# Altium PCB SW 12.PcbDoc
Units mil, origin at the board's own origin, x right, y up, seen from the top; angles counter-clockwise.
Board outline 2753 x 2757 mil, 2 copper layers (Top Layer, Bottom Layer); 38 components, 16 nets, 98 pads, 206 vias.
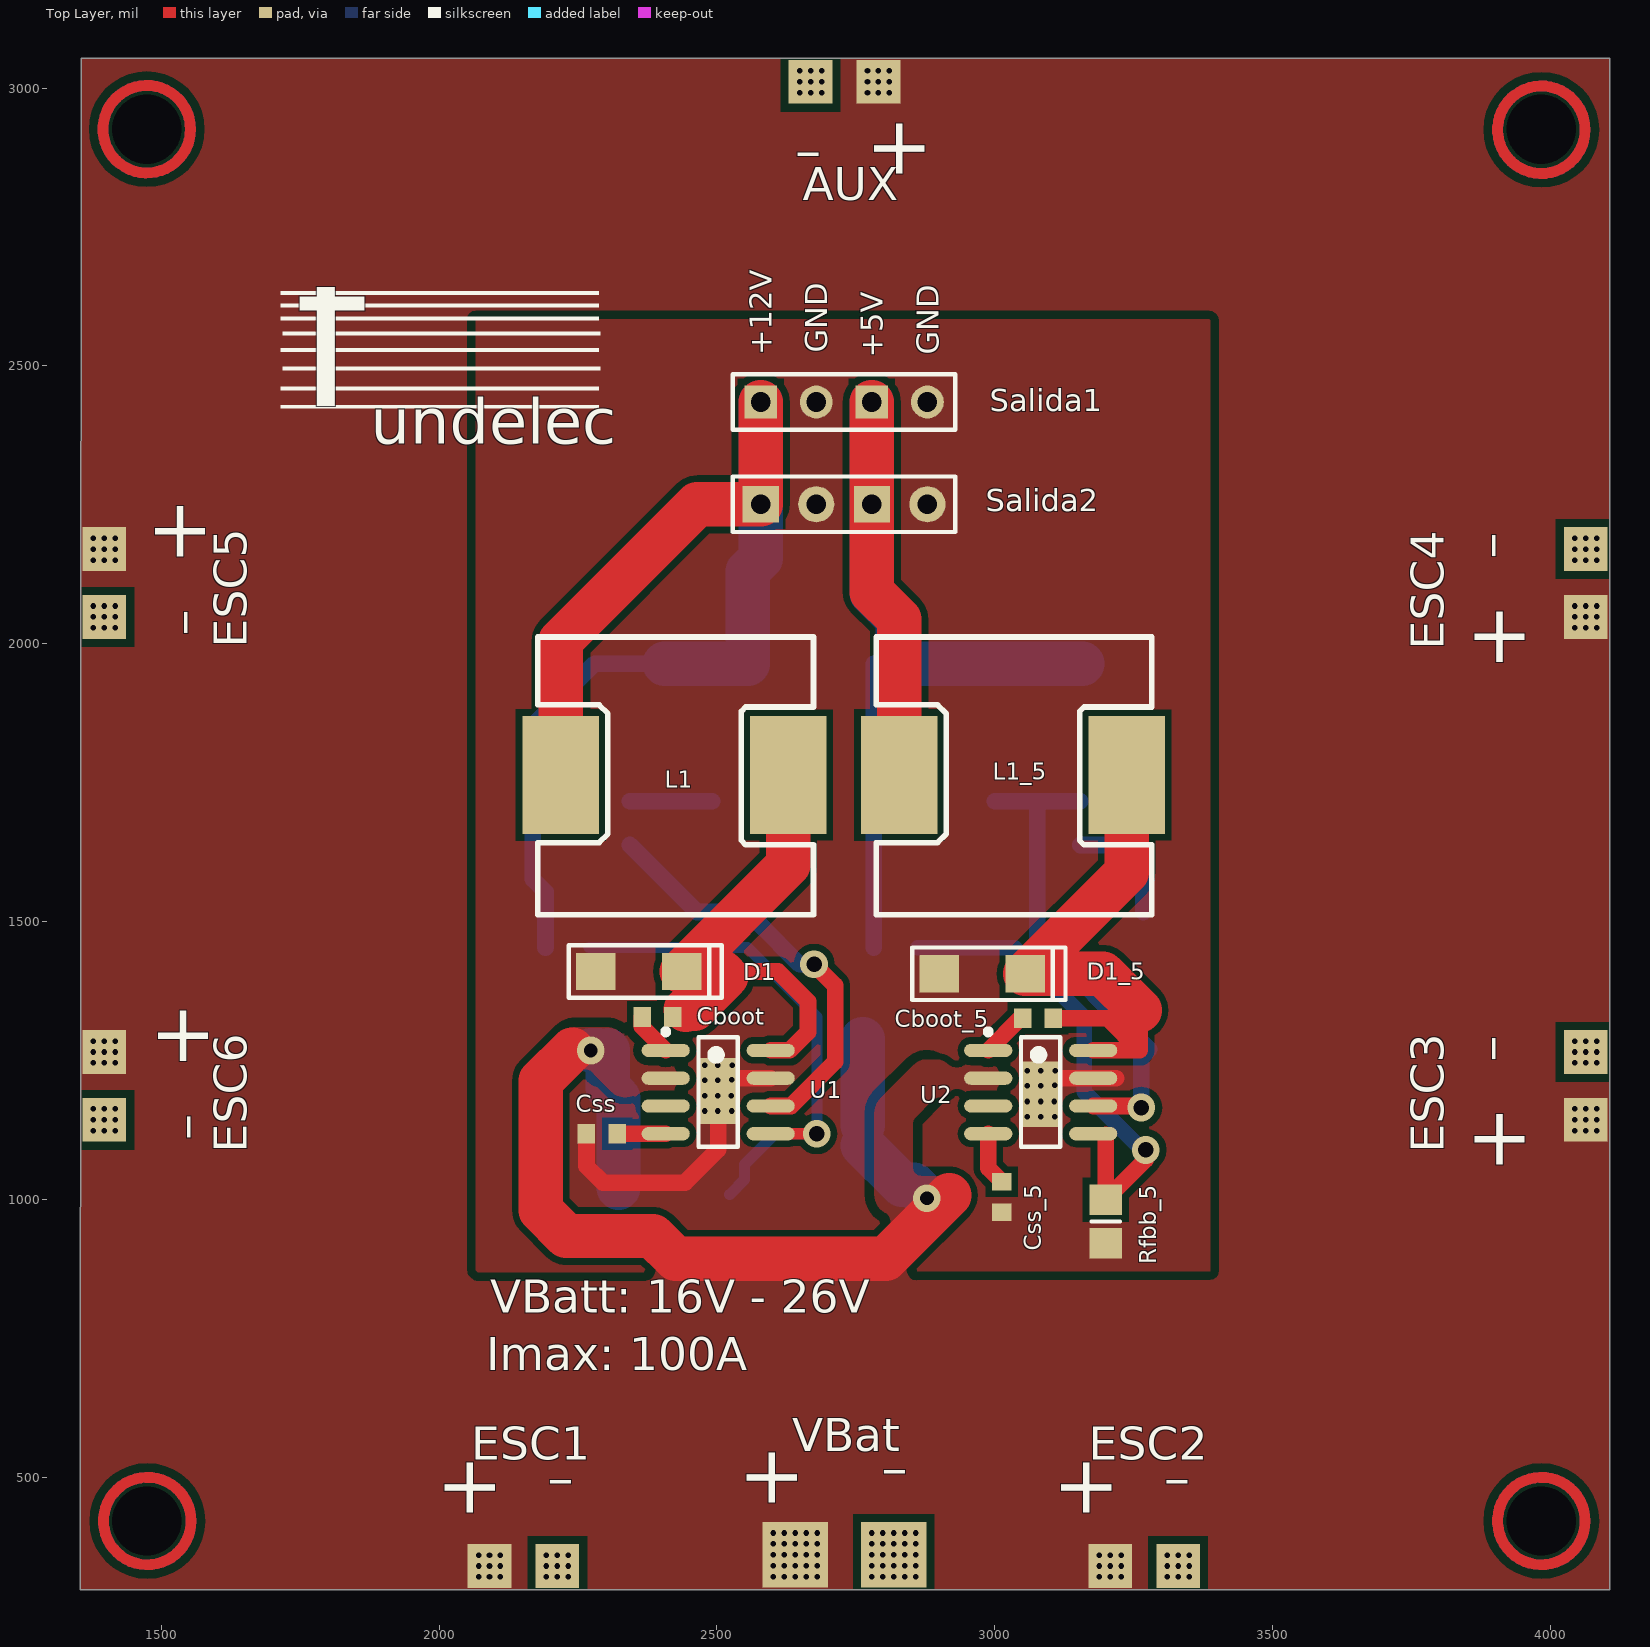
[diagram p0: Top Layer view]
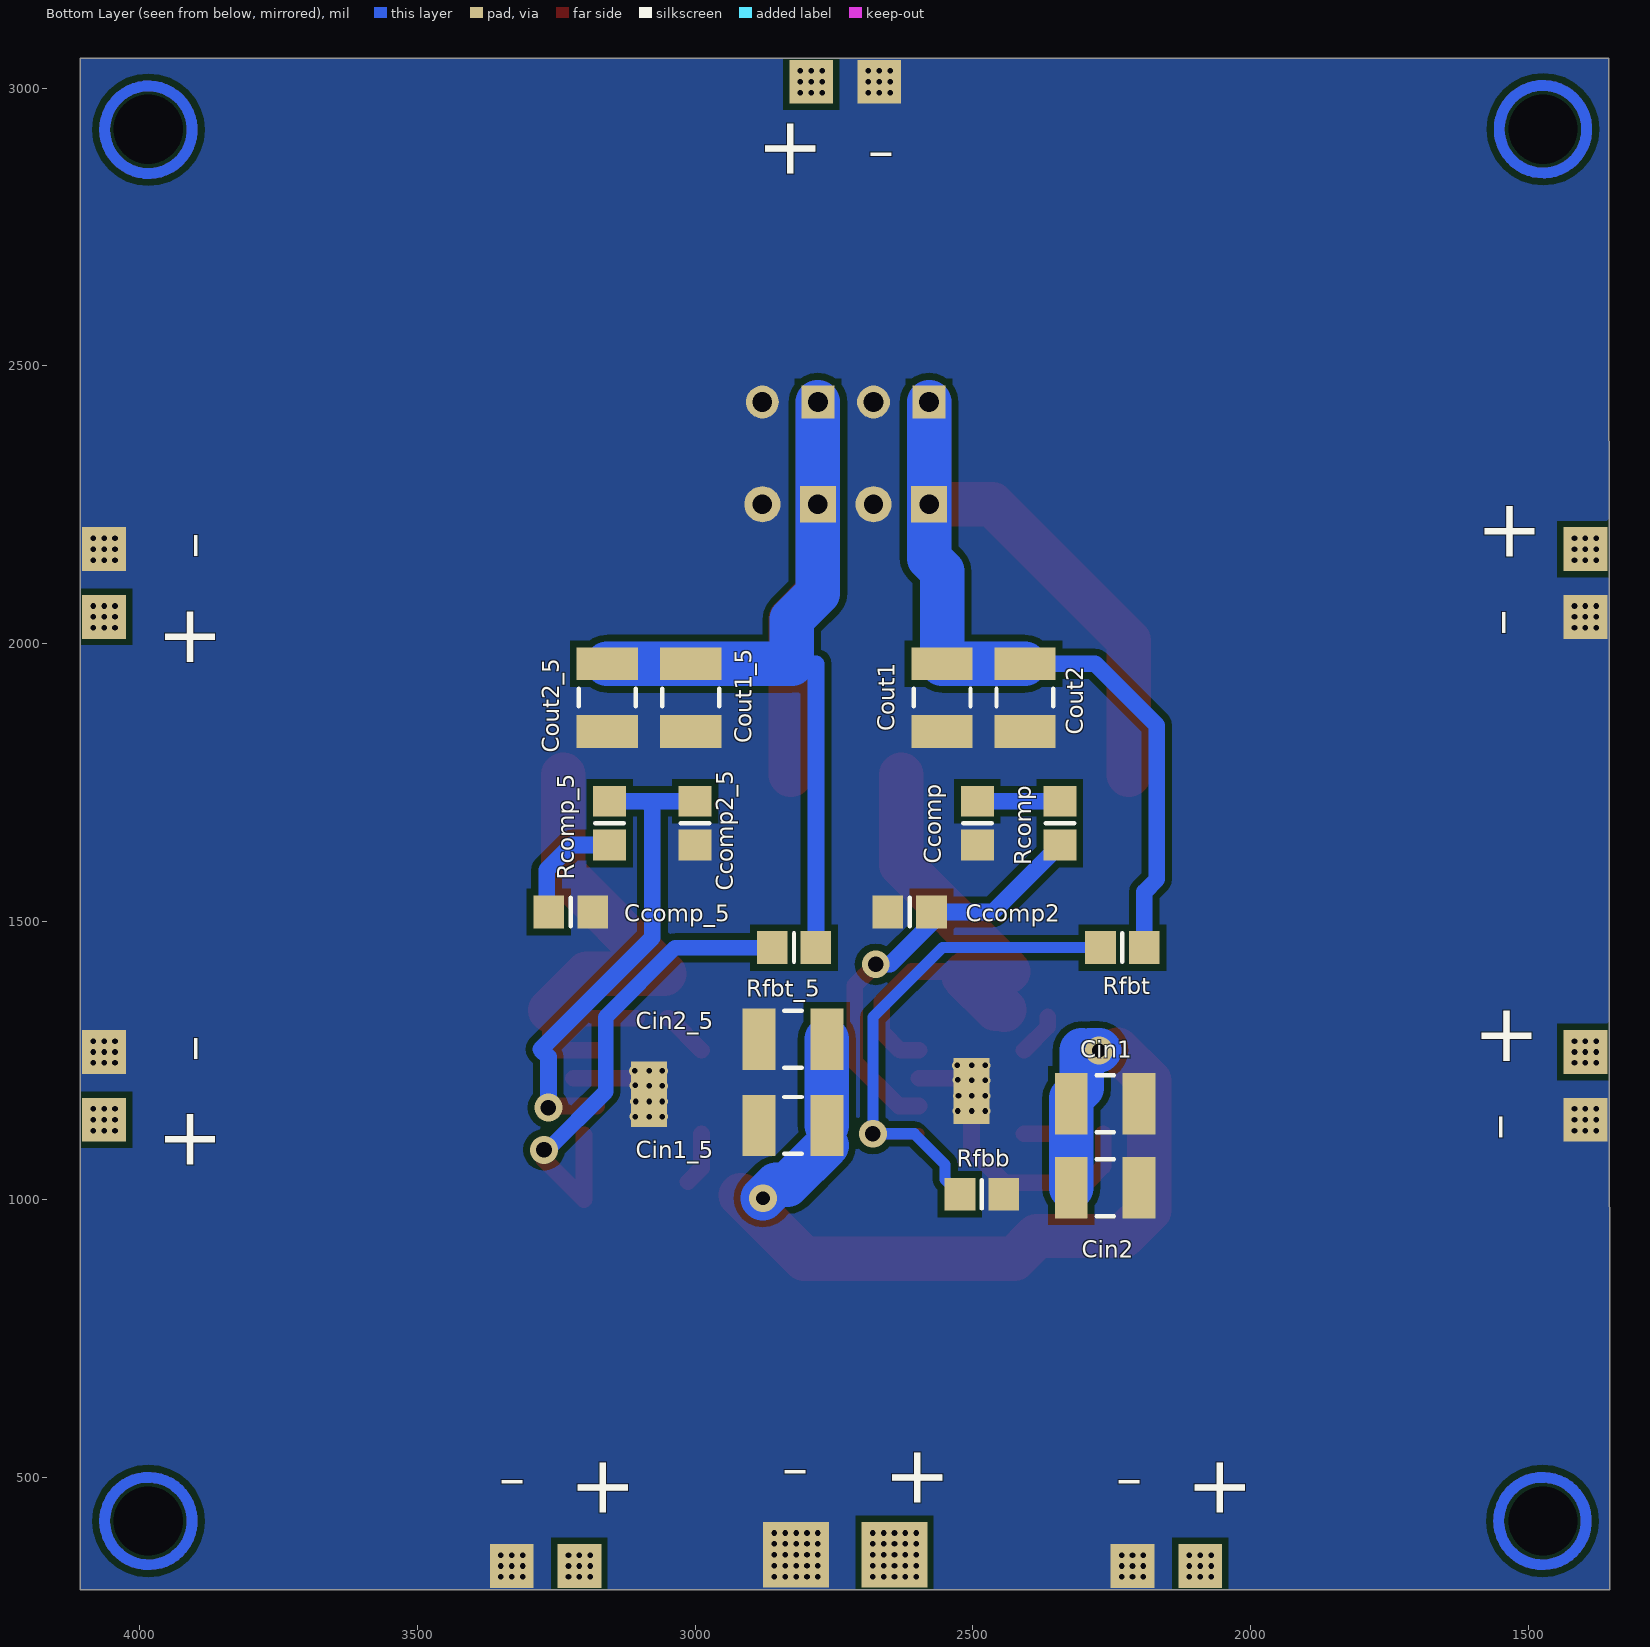
[diagram p1: Bottom Layer view, seen from below]

## Layer stack, top to bottom
Top Solder: solder mask 0.4, Solder Resist, Dk 3.5
Top Layer: signal copper 1.4
Dielectric 1: dielectric 12.6, FR-4, Dk 4.8
Bottom Layer: signal copper 1.4
Bottom Solder: solder mask 0.4, Solder Resist, Dk 3.5

## Board outline
1354,297 4107,297 4107,3054 1356,3054

## Design rules (kind name [scope] priority, off if disabled: settings)
Clearance [All] p1: gap=12
ComponentClearance [All] p1: gap=5 collisioncheckmode=3 verticalgap=5 showdistances=FALSE
PlaneConnect [All] p1: planeconnectstyle=Direct reliefexpansion=20 reliefentries=4 reliefconductorwidth=10 reliefairgap=10
PolygonConnect [All] p1: connectstyle=Direct reliefconductorwidth=10 reliefentries=4 polygonreliefangle="90 Angle" airgapwidth=10
RoutingVias [All] p1: holewidth=25 width=50 viastyle="Through Hole" minholewidth=1 minwidth=1 maxholewidth=28 maxwidth=50
SolderMaskExpansion [All] p1: expansion=4
Width [All] p1: maxlimit=80 minlimit=10 preferedwidth=20
28 further rules are at their usual default settings.

## Classes and differential pairs
component class SW_S_12: Cboot Ccomp Ccomp2 Cin1 Cin2 Cout1 Cout2 Css D1 Iout L1 Rcomp Rfbb Rfbt U1 Vin
component class "SW 12": AUX ESC1 ESC2 ESC3 ESC4 ESC5 ESC6 Salida1 Salida2 VBat
component class SW_S_5: Cboot_5 Ccomp2_5 Ccomp_5 Cin1_5 Cin2_5 Cout1_5 Cout2_5 Css_5 D1_5 L1_5 Rcomp_5 Rfbb_5 Rfbt_5 U2

## Components (designator, comment, footprint, x,y, rotation, side; value= is the part's Value field where it differs from the comment)
AUX "Header 2" "14 AWG Power Footprint" 2849.9,3070.37 r180 top
Cboot "C1608X7R1E104K" 1608[0603] 2393,1328 r0 top
Cboot_5 "C1608X7R1E104K" 1608[0603] 3078,1326 r0 top
Ccomp "CC0805KRX7R9BB152" 6-0805_M 2492,1677 r270 bottom
Ccomp2 "CL21C300JBANNNC" 6-0805_M 2614,1517 r0 bottom
Ccomp2_5 "CL21C300JBANNNC" 6-0805_M 3000,1677 r270 bottom
Ccomp_5 "CC0805KRX7R9BB152" 6-0805_M 3224,1517 r180 bottom
Cin1 "GRM32ER71H475KA88L" C1210_M 2262,1172 r180 bottom
Cin1_5 "GRM32ER71H475KA88L" C1210_M 2824,1133 r0 bottom
Cin2 "GRM32ER71H475KA88L" C1210_M 2262,1021 r180 bottom
Cin2_5 "GRM32ER71H475KA88L" C1210_M 2824,1288 r0 bottom
Cout1 "GRM32ER61E226KE15L" C1210_M 2555.5,1903 r270 bottom
Cout1_5 "GRM32ER61E226KE15L" C1210_M 3008,1903 r270 bottom
Cout2 "GRM32ER61E226KE15L" C1210_M 2406.5,1903 r270 bottom
Cout2_5 "GRM32ER61E226KE15L" C1210_M 3158,1903 r270 bottom
Css "GRM188R71E822KA01D" 1608[0603] 2293,1118 r180 top
Css_5 "GRM188R71E822KA01D" 1608[0603] 3013,1004 r270 top
D1 "B340A-13-F" "SMA Diode Package" 2359.5,1410 r180 top
D1_5 "B340A-13-F" "SMA Diode Package" 2978,1406 r180 top
ESC1 "Header 2" "14 AWG Power Footprint" 2031.78,281 r0 top
ESC2 "Header 2" "14 AWG Power Footprint" 3149.2,281 r0 top
ESC3 "Header 2" "14 AWG Power Footprint" 4122.86,1083.99 r90 top
ESC4 "Header 2" "14 AWG Power Footprint" 4122.86,1989.16 r90 top
ESC5 "Header 2" "14 AWG Power Footprint" 1338.58,2229.32 r270 top
ESC6 "Header 2" "14 AWG Power Footprint" 1338.58,1324.15 r270 top
L1 "SRR1260-150M" SRR1260 2426,1764 r180 top
L1_5 "SRR1260-150M" SRR1260 3035,1764 r180 top
Rcomp "CRCW080538K3FKEA" 6-0805_M 2343.5,1677 r90 bottom
Rcomp_5 "CRCW080538K3FKEA" 6-0805_M 3154,1677 r270 bottom
Rfbb "CRCW0805732RFKEA" 6-0805_M 2484,1009 r180 bottom
Rfbb_5 "CRCW0805732RFKEA" 6-0805_M 3200,960 r270 top
Rfbt "CRCW080510K2FKEA" 6-0805_M 2231,1453 r0 bottom
Rfbt_5 "CRCW080510K2FKEA" 6-0805_M 2822,1453 r0 bottom
Salida1 "Header 4" HDR1X4#1 2579,2435 r0 top (schematic designator Out1)
Salida2 "Header 4" HDR1X4#2 2579,2251 r0 top (schematic designator Out2)
U1 "TPS54331DDAR" TI-D8_N 2502.5,1193 r0 top
U2 "TPS54331DDAR" TI-D8_N 3083,1193 r0 top
VBat "Header 2" "10 AWG Power Footprint" 2582.18,301 r0 top (schematic designator Batt)

## Footprints (in the part's own frame and the unit in brackets; to place one, negate y for a bottom-side part, rotate by r counter-clockwise, add the part's x,y. Pads: shape width x height; smd on the part's side, far side on the other; paste and mask are expansions set on the pad)
6-0805_M [mm] "Chip Resistor, Body 2.0x1.2mm, IPC Low Density"
  rect 1.4x1.5 smd: 1(-1,0) 2(1,0)
  silkscreen extent 0,-0.65 0,0.65, body extent -1.07,-0.7 1.07,0.7, height 0.7
"10 AWG Power Footprint" [mm] "10 AWG Power Footprint"
  rect 3x3 all layers, no hole: 1(1.5,1.5) 2(6,1.5)
"14 AWG Power Footprint" [mm] "10 AWG Power Footprint"
  rect 2x2 all layers, no hole: 1(1.5,1.5) 2(4.6,1.5)
1608[0603] [mm] "Chip Capacitor, Body 1.6x0.8mm, IPC High Density"
  rect 0.8x0.9 smd: 1(-0.7,0) 2(0.7,0)
  body extent -0.87,-0.48 0.87,0.48, height 1.3
C1210_M [mm] "Chip Capacitor, Body 3.2x2.5mm, IPC Low Density"
  rect 1.5x2.8 smd: 1(-1.55,0) 2(1.55,0)
  silkscreen extent -0.4,-1.3 0.4,1.3, body extent -1.7,-1.35 1.7,1.35, height 1.5
HDR1X4#1 [mm] "Connector; Header; 4 Position"
  rect 1.5x1.5 hole 0.9: 1(0,0) 3(5.08,0)
  round 1.5 hole 0.9: 2(2.54,0) 4(7.62,0)
  silkscreen extent -1.27,-1.27 8.89,1.27
HDR1X4#2 [mm] "Connector; Header; 4 Position"
  rect 1.651x1.651 hole 0.889: 1(0,0) 3(5.08,0)
  round 1.651 hole 0.889: 2(2.54,0) 4(7.62,0)
  silkscreen extent -1.27,-1.27 8.89,1.27
"SMA Diode Package" [mm]
  rect 1.8x1.7 smd: 1(-1.965,0) 2(1.965,0)
  silkscreen extent -3.8,-1.2 3.2,1.2, body extent -2.6,-1.2 2.6,1.2, height 2.44
SRR1260 [mm]
  rect 3.5x5.4 smd paste+0: 1(-5.15,0)
  rect 3.5x5.4 smd: 2(5.25,0)
  silkscreen extent -6.3,-6.3 6.3,6.4, body extent -6.3,-6.3 6.3,6.4, height 6.15
TI-D8_N [mm] "SOIC, 8-Leads, Body 4.9x3.9mm, Pitch 1.27mm, IPC Medium Density"
  oval 2.2x0.6 smd: 1(-2.4,1.905) 2(-2.4,0.635) 3(-2.4,-0.635) 4(-2.4,-1.905) 5(2.4,-1.905) 6(2.4,-0.635) 7(2.4,0.635) 8(2.4,1.905)
  silkscreen extent -2.52,-2.5 0.9,2.88, body extent -2,-2.5 2,2.5, height 1.75

## Part data
AUX ESC1 ESC2 ESC3 ESC4 ESC5 ESC6 VBat: "Header, 2-Pin"
Ccomp Ccomp_5: "CC0805KRX7R9BB15"
Cin1 Cin1_5 Cin2 Cin2_5: "GRM32ER71H475KA8"
Cout1 Cout1_5 Cout2 Cout2_5: "GRM32ER61E226KE1"
Css Css_5: "GRM188R71E822KA0"
Salida1 Salida2: "Header, 4-Pin"

## Free pads (board coordinates)
  round 78.74 hole 125: 0(1474,421) 0(1474,2926) 0(3984,421) 0(3984,2926)
  rect 65x118.11 all layers, no hole: ""(2502.5,1195) ""(3083,1189)

## Via types
v1: diameter 10, hole 10, Top Layer to Bottom Layer, 176 vias
v2: diameter 20, hole 10, Top Layer to Bottom Layer, 24 vias
v3: diameter 50, hole 28, Top Layer to Bottom Layer, 4 vias
v4: diameter 50, hole 25, Top Layer to Bottom Layer, 2 vias

## Nets (pads, with @x,y where several pads share a name; then routed paths per layer and width w, separated by ;. In a path a pad name is that pad's centre, name@x,y a point inside that pad or via, vN(x,y) a via of type N, cw(c..) or ccw(c..) an arc to the next point about the centre after c; other vN are vias at no path point)
+5V: Cout1_5.1 Cout2_5.1 L1_5.2 Rfbt_5.1 Salida1.3 Salida2.3 | length 2024.9
  Top Layer w80: Salida1.3 Salida2.3 2779,2093 2828.31,2043.69 L1_5.2
  Bottom Layer w30: Rfbt_5.1 2782.63,1964.02
  Bottom Layer w80: Salida1.3 Salida2.3 2779,2091 2825.98,2044.02 2825.98,1964.02 Cout1_5.1 Cout2_5.1
+12V: Cout1.1 Cout2.1 L1.2 Rfbt.1 Salida1.1 Salida2.1 | length 2209.3
  Top Layer w80: L1.2 2219.31,2005.31 2465,2251 Salida2.1 Salida1.1
  Bottom Layer w30: Rfbt.1 2191.63,1553.37 2169,1576 2169,1853 2280.02,1964.02 Cout2.1
  Bottom Layer w80: Cout2.1 Cout1.1 2555.5,2130.5 2579,2154 Salida2.1 Salida1.1
GND: AUX.2 Ccomp2.2 Ccomp2_5.2 Ccomp.2 Ccomp_5.2 Cin1.2 Cin1_5.2 Cin2.2 Cin2_5.2 Cout1.2 Cout1_5.2 Cout2.2 Cout2_5.2 Css.2 Css_5.2 D1.2 D1_5.2 ESC1.2 ESC2.2 ESC3.2 ESC4.2 ESC5.2 ESC6.2 pad. Rfbb.2 Rfbb_5.2 Salida1.2 Salida1.4 Salida2.2 Salida2.4 U1.7 U2.7 VBat.2 | length 637.8
  Top Layer w30: Css.2 2265.44,1059.56 2295,1030 2443,1030 2502.5,1089.5 2502.5,1195 pad.@2502.5,1213.33 ; pad.@2525.5,1218 U1.7 ; pad.@3109,1218 U2.7 U2.7@3219.08,1218
  other v1: 2193.2,320.37 2212.88,320.37 2232.57,320.37 3310.61,320.37 3330.3,320.37 3349.98,320.37 2779.03,320.69 2798.72,320.69 2818.4,320.69 2838.09,320.69 2857.77,320.69 2193.2,340.06 2212.88,340.06 2232.57,340.06 2779.03,340.37 2798.72,340.37 2818.4,340.37 2838.09,340.37 2857.77,340.37 3310.61,340.06 3330.3,340.06 3349.98,340.06 2193.2,359.74 2212.88,359.74 2232.57,359.74 2779.03,360.06 2798.72,360.06 2818.4,360.06 2838.09,360.06 2857.77,360.06 3310.61,359.74 3330.3,359.74 3349.98,359.74 2779.03,379.74 2798.72,379.74 2818.4,379.74 2838.09,379.74 2857.77,379.74 2779.03,399.43 2798.72,399.43 2818.4,399.43 2838.09,399.43 2857.77,399.43 1377.95,1123.36 1397.64,1123.36 1417.32,1123.36 1377.95,1143.05 1397.64,1143.05 1417.32,1143.05 1377.95,1162.73 1397.64,1162.73 1417.32,1162.73 4044.12,1245.41 4063.8,1245.41 4083.49,1245.41 4044.12,1265.09 4063.8,1265.09 4083.49,1265.09 4044.12,1284.78 4063.8,1284.78 4083.49,1284.78 1377.95,2028.53 1397.64,2028.53 1417.32,2028.53 1377.95,2048.21 1397.64,2048.21 1417.32,2048.21 1377.95,2067.9 1397.64,2067.9 1417.32,2067.9 4044.12,2150.57 4063.8,2150.57 4083.49,2150.57 4044.12,2170.26 4063.8,2170.26 4083.49,2170.26 4044.12,2189.95 4063.8,2189.95 4083.49,2189.95 2649.11,2991.63 2668.8,2991.63 2688.48,2991.63 2649.11,3011.32 2668.8,3011.32 2688.48,3011.32 2649.11,3031 2668.8,3031 2688.48,3031
  other v2: 3059,1149 3083,1149 3108,1149 2478,1159 2502,1159 2527,1159 3059,1176 3083,1176 3107,1176 2478,1186 2502,1186 2526,1186 3059,1204 3083,1204.33 3108,1205 2478,1214 2502,1214.33 2527,1215 3059,1231 3083,1231 3109,1231 2478,1241 2502,1241 2528,1241
NetCboot_1: Cboot.1 U1.1 | length 77.6
  Top Layer w30: Cboot.1 2365.44,1310.57 U1.1
NetCboot_5_1: Cboot_5.1 U2.1 | length 86
  Top Layer w30: U2.1 3046.51,1326 Cboot_5.1
NetCcomp2_1: Ccomp2.1 Rcomp.1 U1.6 | length 772
  Top Layer w30: U1.6 2633.37,1168 2713,1247.63 2713,1385 v3(2675,1423)
  Bottom Layer w30: Rcomp.1 2464.13,1517 Ccomp2.1 2574.63,1497.37 2649,1423 v3(2675,1423)
NetCcomp2_5_1: Ccomp2_5.1 Rcomp_5.1 U2.6 | length 877.1
  Top Layer w30: U2.6 v3@3256,1168
  Bottom Layer w30: Ccomp2_5.1 3087,1716.37 ; Rcomp_5.1 3087,1716.37 ; v3(3264,1165) 3264,1256 3278,1270 3077,1471 3077,1706.37 3087,1716.37
NetCcomp_1: Ccomp.1 Rcomp.2 | length 148.5
  Bottom Layer w30: Rcomp.2 Ccomp.1
NetCcomp_5_1: Ccomp_5.1 Rcomp_5.2 | length 207.6
  Bottom Layer w30: Rcomp_5.2 3222.37,1637.63 3267.37,1592.63 Ccomp_5.1@3267.37,1517
NetCss_1: Css.1 U1.4 | length 87.5
  Top Layer w30: Css.1 U1.4
NetCss_5_1: Css_5.1 U2.4 | length 96.6
  Top Layer w30: U2.4 2988.51,1056.05 Css_5.1
NetRfbb_1: Rfbb.1 Rfbt.2 U1.5 | length 972.2
  Top Layer w20: U1.5 v3(2680,1118)
  Bottom Layer w20: Rfbt.2 2555,1453 2680,1328 v3(2680,1118) 2605,1118 2550,1063 2550,1035.63 Rfbb.1
NetRfbb_5_1: Rfbb_5.1 Rfbt_5.2 U2.5 | length 876.2
  Top Layer w28: v3@3272,1079 v3(3272,1089)
  Top Layer w30: U2.5@3200,1116 Rfbb_5.1 3272,1071.37 v3@3272,1079
  Bottom Layer w28: Rfbt_5.2 3036,1453 3161,1328 3161,1193.7 3265.7,1089 v3(3272,1089)
PH_5: Cboot_5.2 D1_5.1 L1_5.1 U2.8 | length 1001.5
  Top Layer w30: Cboot_5.2 3203,1326 3261,1268 ; U2.8 3261,1268 ; 3261,1340 3261,1268
  Top Layer w80: L1_5.1 3237.76,1588.39 D1_5.1 3195,1406 3261,1340
PH_12: Cboot.2 D1.1 L1.1 U1.8 | length 929.3
  Top Layer w30: D1.1 2508,1410 2610,1410 2664,1356 2664,1301 2631,1268 U1.8
  Top Layer w80: D1.1 2628.76,1601.89 L1.1 ; 2444,1341 2446,1343 2459,1343 2517,1401 2508,1410
VBATT: AUX.1 Cin1.1 Cin1_5.1 Cin2.1 Cin2_5.1 ESC1.1 ESC2.1 ESC3.1 ESC4.1 ESC5.1 ESC6.1 U1.2 U2.2 VBat.1 | length 1711
  Top Layer w80: 2239.5,1269.5 2183,1213 2183,980.27 2229.27,934 2385,934 2426,893 2804,893 2918,1007
  Bottom Layer w80: v4(2273,1268) v4@2288.76,1268 ; 2304,1268 2304,1201.02 2323.02,1182 Cin1.1 Cin2.1 ; Cin1_5.1@2762.98,1096.86 2833.96,1025.88 2854.12,1025.88 v4(2878,1002) ; Cin1_5.1 Cin2_5.1
  other v1: 2071.15,320.37 2090.83,320.37 2110.52,320.37 3188.57,320.37 3208.25,320.37 3227.94,320.37 2601.87,320.69 2621.55,320.69 2641.24,320.69 2660.92,320.69 2680.61,320.69 2071.15,340.06 2090.83,340.06 2110.52,340.06 2601.87,340.37 2621.55,340.37 2641.24,340.37 2660.92,340.37 2680.61,340.37 3188.57,340.06 3208.25,340.06 3227.94,340.06 2071.15,359.74 2090.83,359.74 2110.52,359.74 2601.87,360.06 2621.55,360.06 2641.24,360.06 2660.92,360.06 2680.61,360.06 3188.57,359.74 3208.25,359.74 3227.94,359.74 2601.87,379.74 2621.55,379.74 2641.24,379.74 2660.92,379.74 2680.61,379.74 2601.87,399.43 2621.55,399.43 2641.24,399.43 2660.92,399.43 2680.61,399.43 4044.12,1123.36 4063.8,1123.36 4083.49,1123.36 4044.12,1143.05 4063.8,1143.05 4083.49,1143.05 4044.12,1162.73 4063.8,1162.73 4083.49,1162.73 1377.95,1245.41 1397.64,1245.41 1417.32,1245.41 1377.95,1265.09 1397.64,1265.09 1417.32,1265.09 1377.95,1284.78 1397.64,1284.78 1417.32,1284.78 4044.12,2028.53 4063.8,2028.53 4083.49,2028.53 4044.12,2048.21 4063.8,2048.21 4083.49,2048.21 4044.12,2067.9 4063.8,2067.9 4083.49,2067.9 1377.95,2150.57 1397.64,2150.57 1417.32,2150.57 1377.95,2170.26 1397.64,2170.26 1417.32,2170.26 1377.95,2189.95 1397.64,2189.95 1417.32,2189.95 2771.16,2991.63 2790.84,2991.63 2810.53,2991.63 2771.16,3011.32 2790.84,3011.32 2810.53,3011.32 2771.16,3031 2790.84,3031 2810.53,3031
pads on no net: U1.3 U2.3

## Polygon pours and split planes (outlines as drawn)
GND on Bottom Layer "VBATT mask" (solid, pour order 12): 1356,3054 4107,3054 4107,297 1354,297
GND on Bottom Layer "gnd mask" (solid, pour order 4): 2066,836 2066,2583 3386,2583 3386,836
VBATT on Top Layer "VBATT mask" (solid, pour order 10): 1354,297 1356,299 1356,3054 4107,3054 4107,297
GND on Top Layer "gnd mask" (solid, pour order 6): 2066,868.54 2066,2584 3386,2584 3388,2582 3388,870.58

## Other copper
Multi-Layer:
  circle w19.68: c1474,2926 r78.74
  circle w19.68: c1475,421 r78.74
  circle w19.68: c3984,421 r78.74
  circle w19.68: c3984,2925 r78.74

## Silkscreen, mask and mechanical layers (free items; w line width, h text height)
Top Overlay:
  rectangle: 1715,2423 2288,2430
  rectangle: 1715,2456 2288,2463
  rectangle: 1718,2492 2291,2499
  rectangle: 1715,2525 2288,2532
  rectangle: 1718,2555 2291,2562
  rectangle: 1715,2582 2288,2589
  rectangle: 1715,2605 2288,2612
  rectangle: 1715,2628 2288,2635
  text "-" at 2691,2951 h180 r180
  text "+" at 2748,2951 h180 r270
  text "GND" at 2698.99,2524 h40 r90
  text "GND" at 2898.99,2520 h40 r90
  text "+12V" at 2598.99,2519 h40 r90
  text "+5V" at 2798.99,2515 h40 r90
  text "f" at 1741,2333 h500
  text "undelec" at 1877,2333 h140
  text "-" at 3969,2150 h180 r90
  text "+" at 1474,2121 h180
  text "+" at 3969,2093 h180 r180
  text "-" at 1474,2064 h180 r270
  text "-" at 3969,1245 h180 r90
  text "+" at 1479,1213 h180
  text "+" at 3969,1188 h180 r180
  text "-" at 1479,1156 h180 r270
  text "VBatt: 16V - 26V" at 2092,796 h60
  text "Imax: 100A" at 2085,692 h60
  text "+" at 2680,439 h180 r90
  text "-" at 2794,439 h180
  text "+" at 2136,421 h180 r90
  text "-" at 2193,421 h180
  text "+" at 3246,421 h180 r90
  text "-" at 3303,421 h180
Bottom Overlay:
  text "-" at 2691,2951 h180 r180
  text "+" at 2748,2951 h180 r270
  text "-" at 3969,2150 h180 r90
  text "+" at 1474,2121 h180
  text "+" at 3969,2093 h180 r180
  text "-" at 1474,2064 h180 r270
  text "-" at 3969,1245 h180 r90
  text "+" at 1479,1213 h180
  text "+" at 3969,1188 h180 r180
  text "-" at 1479,1156 h180 r270
  text "+" at 2680,439 h180 r90
  text "-" at 2794,439 h180
  text "+" at 2136,421 h180 r90
  text "-" at 2193,421 h180
  text "+" at 3246,421 h180 r90
  text "-" at 3303,421 h180